# EAGLE board speedy barebone (EAGLE 9.5.2)
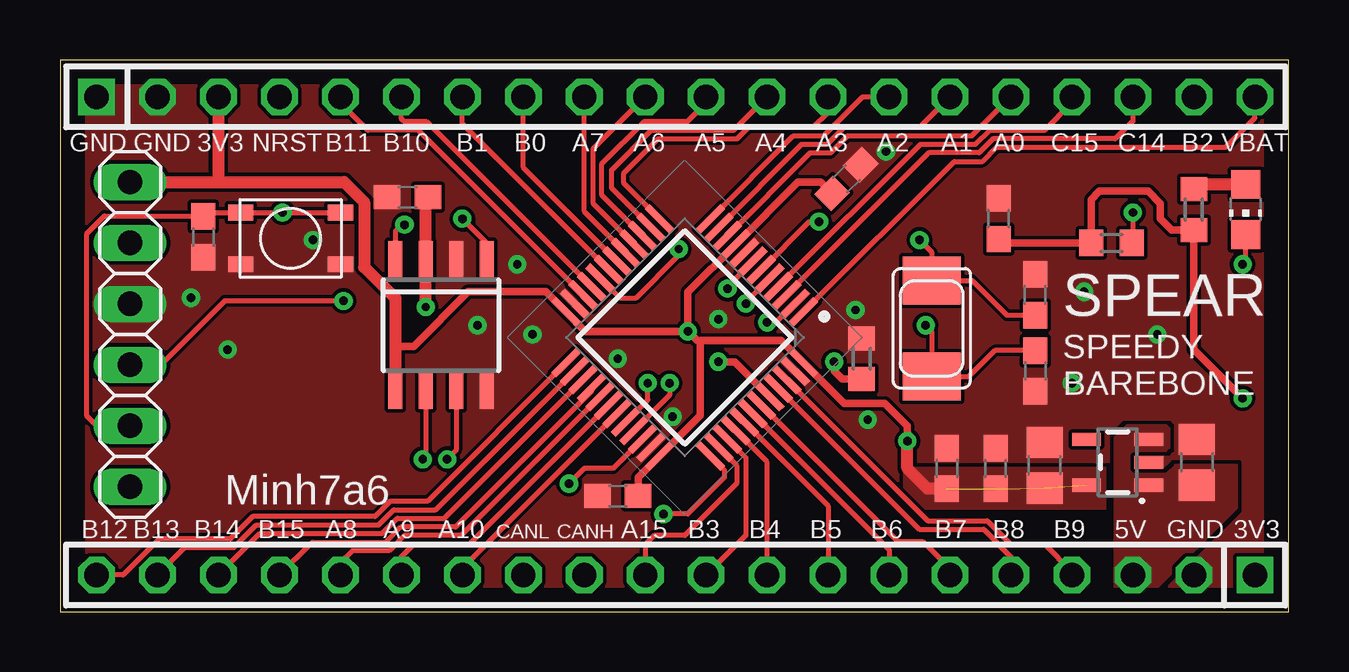
[diagram p0: board, top side]
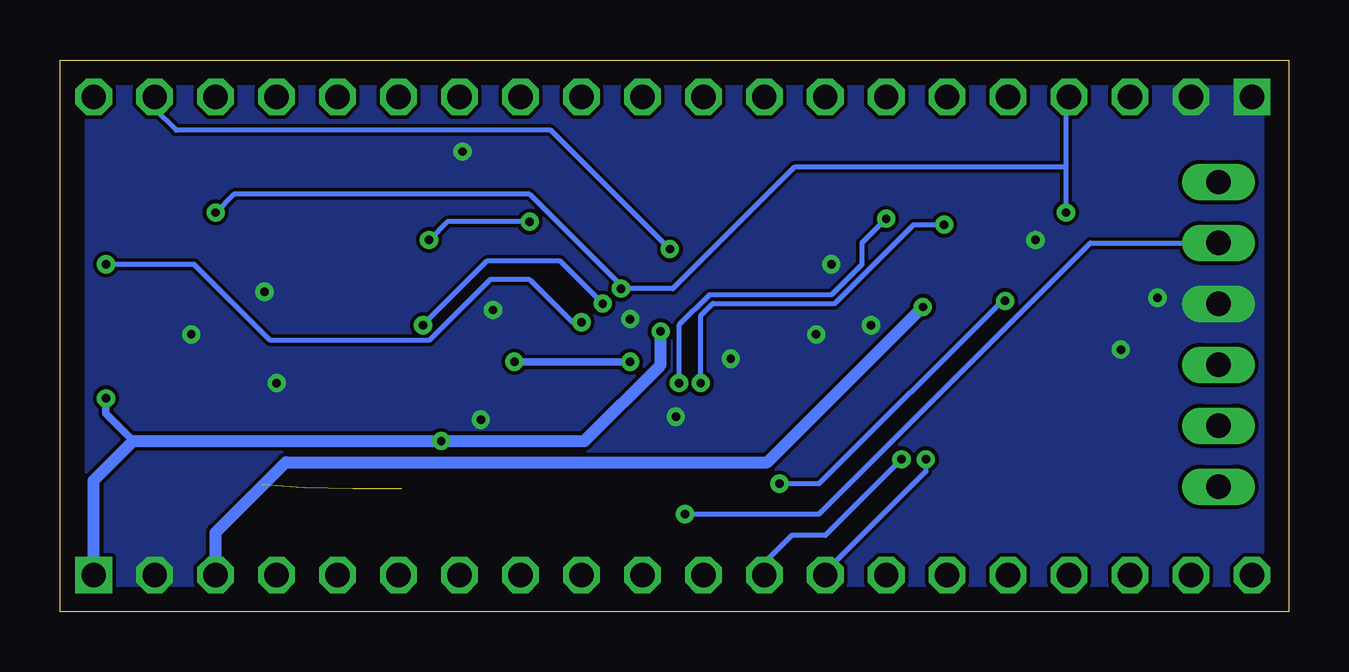
[diagram p1: board, bottom side, seen from below]

Size 51.19 x 23 mm. Coordinates in mm from the lower left corner, seen from the top.
Outline: 51.19,0 51.19,23 0,23 0,0 51.19,0
Copper layers (1*16): Top 0.035mm / dielectric 1.5mm / Bottom 0.035mm
Design rules "default *": minimum track width 6mil, minimum drill 0.35mm, track to track 6mil, track to pad 6mil, pad to pad 6mil, via to via 6mil, smd to smd 6mil, copper to edge 40mil, drill to drill 6mil, minimum pad ring 10mil, minimum via ring 8mil, stop-mask expansion 4mil, vias tented up to drill 30mil, thermal gap 10mil

## Footprints (pad centres in the part's own frame; a part is rotated, then mirrored left to right if it is on the bottom)
C0805 = smd 1.3 x 1.5: 1 -0.95,0; 2 0.95,0
C0603 = smd 1.1 x 1: 1 -0.85,0; 2 0.85,0
QFP50P900X900X160-48N = smd 1.475 x 0.3: 1 -4.238,2.75; 2 -4.238,2.25; 3 -4.238,1.75; 4 -4.238,1.25; 5 -4.238,0.75; 6 -4.238,0.25; 7 -4.238,-0.25; 8 -4.238,-0.75; 9 -4.238,-1.25; 10 -4.238,-1.75; 11 -4.238,-2.25; 12 -4.238,-2.75; 25 4.238,-2.75; 26 4.238,-2.25; 27 4.238,-1.75; 28 4.238,-1.25; 29 4.238,-0.75; 30 4.238,-0.25; 31 4.238,0.25; 32 4.238,0.75; 33 4.238,1.25; 34 4.238,1.75; 35 4.238,2.25; 36 4.238,2.75 | smd 0.3 x 1.475: 13 -2.75,-4.238; 14 -2.25,-4.238; 15 -1.75,-4.238; 16 -1.25,-4.238; 17 -0.75,-4.238; 18 -0.25,-4.238; 19 0.25,-4.238; 20 0.75,-4.238; 21 1.25,-4.238; 22 1.75,-4.238; 23 2.25,-4.238; 24 2.75,-4.238; 37 2.75,4.238; 38 2.25,4.238; 39 1.75,4.238; 40 1.25,4.238; 41 0.75,4.238; 42 0.25,4.238; 43 -0.25,4.238; 44 -0.75,4.238; 45 -1.25,4.238; 46 -1.75,4.238; 47 -2.25,4.238; 48 -2.75,4.238
1X20 = drill 1.016 square: 1 -24.13,0 | drill 1.016 octagon: 2 -21.59,0; 3 -19.05,0; 4 -16.51,0; 5 -13.97,0; 6 -11.43,0; 7 -8.89,0; 8 -6.35,0; 9 -3.81,0; 10 -1.27,0; 11 1.27,0; 12 3.81,0; 13 6.35,0; 14 8.89,0; 15 11.43,0; 16 13.97,0; 17 16.51,0; 18 19.05,0; 19 21.59,0; 20 24.13,0
1X06 = drill 1.016 long: 1 -6.35,0; 2 -3.81,0; 3 -1.27,0; 4 1.27,0; 5 3.81,0; 6 6.35,0
CHIP-LED0805 = smd 1.2 x 1.2: A 0,-1.05; C 0,1.05
R0603 = smd 1 x 1.1: 1 -0.85,0; 2 0.85,0
SOT23-5 = smd 0.55 x 1.2: 1 -0.95,-1.3; 2 0,-1.3; 3 0.95,-1.3; 4 0.95,1.3; 5 -0.95,1.3
SOIC8 = smd 0.6 x 1.5: 1 -1.905,-2.75; 2 -0.635,-2.75; 3 0.635,-2.75; 4 1.905,-2.75; 5 1.905,2.75; 6 0.635,2.75; 7 -0.635,2.75; 8 -1.905,2.75
4.2X3.25 = smd 1.05 x 0.65: P$1 0,0; P$2 4.15,0; P$3 4.15,2.15; P$4 0,2.15
NX5032 = smd 2 x 2.4: P$1 2,0; P$2 -2,0

## Placement (x,y rotation side)
C1  10uF  [C0805]  47.37,6.22 90 top
C2  10uF  [C0805]  41.02,6.1 90 top
C3  100nF  [C0603]  23.24,4.83 180 top
C4  22pF  [C0603]  40.64,10.03 270 top
C5  22pF  [C0603]  40.64,13.21 90 top
C7  100nF  [C0603]  14.48,17.27 180 top
C10  100nF  [C0603]  5.97,15.62 270 top
C14  100nF  [C0603]  32.77,18.03 45 top
C15  100nF  [C0603]  36.96,5.97 90 top
C16  100nF  [C0603]  39.12,16.38 90 top
C17  100nF  [C0603]  38.99,5.97 90 top
IC2  STM32F103C8T6  [QFP50P900X900X160-48N]  26.04,11.43 225 top
JP1  [1X20]  25.65,1.52 180 top
JP2  [1X20]  25.65,21.46 0 top
JP3  [1X06]  2.92,11.56 90 top
LED2  [CHIP-LED0805]  49.4,16.76 180 top
R1  100k  [R0603]  33.4,10.54 90 top
R8  10k  [R0603]  43.81,15.37 180 top
R10  1k  [R0603]  47.24,16.76 90 top
U1  3.3V  [SOT23-5]  44.07,6.22 90 top
U$1  MCP2562-E/SN  [SOIC8]  15.88,11.94 180 top
U$2  4.2X3.25-TACTILE-SWITCH  [4.2X3.25]  11.68,16.64 180 top
X1  8MHz  [NX5032]  36.32,11.81 270 top

## Library data of the parts
C1-C3 C7 C10 C14-C17 = rcl; SPICEPREFIX: C
C4 C5 = resistor
IC2 = LCSC; DESCRIPTION: STM32F103C8T6, 32 bit ARM Cortex M3 Microcontroller 72MHz 64kb Flash, 20kb RAM, USB I2C SPI 48-Pin LQFP; HEIGHT: 1.6mm; MANUFACTURER_NAME: STMicroelectronics; MANUFACTURER_PART_NUMBER: STM32F103C8T6; MOUSER_PART_NUMBER: 511-STM32F103C8T6
JP1-JP3 = pinhead
LED2 = led
R1 R8 R10 = rcl; SPICEPREFIX: R
U1 = SparkFun-IC-Power; PROD_ID: VREG-12457
U$1 = SPEAR
U$2 = LCSC
X1 = adafruit

## Nets
3.3V: C2.1 C3.1 C14.1 C15.1 C16.1 C17.1 IC2.9 IC2.24 IC2.36 IC2.48 JP1.1 JP2.3 JP3.6 R8.2 R10.1 U1.5 U$1.5
5V: C1.1 C7.1 JP1.3 U1.1 U1.3 U$1.3
BOOT0: IC2.44 R1.1
CANH: JP1.12 U$1.7
CANL: JP1.13 U$1.6
GND: C1.2 C2.2 C3.2 C4.2 C5.2 C7.2 C10.2 C14.2 C15.2 C16.2 C17.2 IC2.8 IC2.23 IC2.35 IC2.47 JP1.2 JP2.1 JP2.2 JP3.4 R1.2 U1.2 U$1.2 U$1.8 U$2.P$3 U$2.P$4
N$9: LED2.A R10.2
NRST: C10.1 IC2.7 JP2.4 JP3.2 R8.1 U$2.P$1 U$2.P$2
OSC32_IN: IC2.3 JP2.18
OSC32_OUT: IC2.4 JP2.17
OSC_IN: C4.1 IC2.5 X1.P$1
OSC_OUT: C5.1 IC2.6 X1.P$2
PA0-WKUP: IC2.10 JP2.16
PA1: IC2.11 JP2.15
PA2: IC2.12 JP2.14
PA3: IC2.13 JP2.13
PA4: IC2.14 JP2.12
PA5: IC2.15 JP2.11
PA6: IC2.16 JP2.10
PA7: IC2.17 JP2.9
PA8: IC2.29 JP1.16
PA9: IC2.30 JP1.15
PA10: IC2.31 JP1.14
PA11: IC2.32 U$1.4
PA12: IC2.33 U$1.1
PA15: IC2.38 JP1.11
PB0: IC2.18 JP2.8
PB1: IC2.19 JP2.7
PB2: IC2.20 JP2.19
PB3_SWO: IC2.39 JP1.10
PB4: IC2.40 JP1.9
PB5: IC2.41 JP1.8
PB6: IC2.42 JP1.7
PB7: IC2.43 JP1.6
PB8: IC2.45 JP1.5
PB9: IC2.46 JP1.4
PB10: IC2.21 JP2.6
PB11: IC2.22 JP2.5
PB12: IC2.25 JP1.20
PB13: IC2.26 JP1.19
PB14: IC2.27 JP1.18
PB15: IC2.28 JP1.17
PC13: IC2.2 LED2.C
SWCLK: IC2.37 JP3.5
SWDIO: IC2.34 JP3.3
VBAT: IC2.1 JP2.20

## Tracks (layer width: path | path; a pad name or v marks a point on that pad's centre or on a via)
3.3V  (via drill 0.35)  (3 unrouted)
  Top 0.305: C14.1 31.69,17.91 30.74,17.91 IC2.9 26.16,13.32 v26.16,11.68 | C3.1 24.09,5.6 IC2.36 26.67,8.18 26.67,11.3 | v26.16,11.68 26.54,11.3 26.67,11.3 | 26.67,11.3 30.05,11.3 IC2.48 32.67,8.68 34.37,8.68 35.31,7.75 v35.31,7.11 | v26.16,11.68 21.89,11.68 IC2.24 20.24,13.34 17.02,13.34 14.73,11.05 13.97,11.05 | C16.1 39.28,15.37 R8.2 42.97,17.18 43.31,17.53 45.34,17.53 45.85,17.02 45.85,16.38 46.32,15.91 R10.1 47.24,10.92 v49.28,8.89 | U$1.5 13.97,9.4
  Top 0.508: C15.1 36.16,5.12 35.31,5.97 v35.31,7.11 | 13.97,9.4 13.97,11.05 13.97,13.06 12.67,14.36 12.67,17.07 11.84,17.91 6.6,17.91 | JP3.6 6.6,17.91 | JP2.3 6.6,17.91
  Bottom 0.305: v49.28,8.89 49.28,8.26 48.13,7.11
  Bottom 0.508: v26.16,11.68 26.16,10.29 29.34,7.11 v35.31,7.11 48.13,7.11 49.78,5.46 JP1.1
  pour Top (no thermals): 43.56,5.97 35.18,5.97 35.18,4.32 43.56,4.32
5V  (via drill 0.35)
  Top 0.508: v15.24,12.7 U$1.3 15.24,17.18 C7.1
  Bottom 0.508: JP1.3 44.7,3.3 41.78,6.22 21.72,6.22 v15.24,12.7
  pour Top (no thermals): 43.94,0.64 45.34,0.64 49.02,4.32 49.02,6.1 46.48,6.1 46.1,5.71 44.83,5.71 44.58,5.97 44.58,6.48 44.7,6.6 45.97,6.6 46.23,6.86 46.23,7.62 46.1,7.75 44.45,7.75 43.94,7.24
BOOT0  (via drill 0.35)
  Top 0.203: IC2.44 29.03,9.49
  Top 0.305: 29.03,9.49 28.11,10.41 v27.43,10.41 | v32.26,10.41 32.26,10.03 32.6,9.69 R1.1
  Bottom 0.305: v32.26,10.41 v27.43,10.41
CANH  (via drill 0.35)
  Top 0.203: U$1.7 16.51,6.73 v16.13,6.35
  Bottom 0.203: v16.13,6.35 19.3,3.17 20.7,3.17 21.84,2.03 JP1.12
CANL  (via drill 0.35)
  Top 0.203: U$1.6 15.24,6.48 v15.11,6.35
  Bottom 0.203: v15.11,6.35 15.11,5.84 19.3,1.65 JP1.13
GND  (via drill 0.35)
  other vias: 27.43,12.19 33.66,8 33.15,12.57 42.67,13.34 45.72,11.56 42.16,9.53 6.99,10.92 5.46,13.08 10.54,15.49 19.68,11.56 19.05,14.48 17.4,11.94 23.24,10.54 34.42,19.18 25.53,8.13
  pour Bottom (no thermals): -0.13,22.99 -0.13,0 51.18,0 51.18,22.99
  pour Top (rank 6, no thermals): -0.13,22.99 -0.13,0 51.18,0 51.18,22.99
N$9
  Top 0.508: R10.2 47.44,17.81 LED2.A
NRST  (via drill 0.35)
  Top 0.203: IC2.7 27.81,13.56 v27.81,13.46 | v44.7,16.64 44.7,15.41 R8.1 | C10.1 5.99,16.49 | 5.99,16.49 6.13,16.64 U$2.P$2 v9.27,16.64 U$2.P$1 | JP3.2 1.52,7.75 1.12,8.15 1.12,15.76 1.85,16.49 5.99,16.49
  Bottom 0.203: v44.7,16.64 43.94,17.4 31.62,17.4 27.81,13.59 v27.81,13.46 25.65,13.46 20.57,18.54 9.27,18.54 | JP2.4 9.27,21.34 9.27,18.54 | v9.27,16.64 9.27,18.54
OSC32_IN
  Top 0.203: JP2.18 44.7,20.45 43.97,19.71 38.88,19.71 38.29,19.13 36.21,19.13 IC2.3
OSC32_OUT
  Top 0.203: IC2.4 35.85,19.48 38.15,19.48 38.73,20.07 41.02,20.07 42.16,21.21 JP2.17
OSC_IN  (via drill 0.35)
  Top 0.203: IC2.5 28.57,12.91 v28.57,12.84 | v36.07,11.94 36.32,11.68 36.32,9.91 | 36.32,9.91 X1.P$1 | C4.1 38.95,10.88 37.85,9.78 36.45,9.78 36.32,9.91
  Bottom 0.203: v28.57,12.84 30.34,14.61 33.4,14.61 v36.07,11.94
OSC_OUT  (via drill 0.35)
  Top 0.203: IC2.6 31.21,16.26 v31.62,16.26 | v35.81,15.49 36.32,14.99 X1.P$2 38.01,13.81 39.46,12.36 C5.1
  Bottom 0.203: v31.62,16.26 35.05,16.26 v35.81,15.49
PA0-WKUP
  Top 0.203: IC2.10 31.26,19.13 32.11,19.13 32.82,19.84 38,19.84 JP2.16
PA1
  Top 0.203: IC2.11 30.91,19.48 31.96,19.48 32.67,20.19 35.81,20.19 JP2.15
PA2
  Top 0.203: IC2.12 30.55,19.84 31.82,19.84 33.44,21.46 JP2.14
PA3
  Top 0.203: IC2.13 23.5,17.86 23.5,18.29 24.92,19.71 28.21,19.71 28.7,20.19 31.37,20.19 32,20.83 JP2.13
PA4
  Top 0.203: IC2.14 22.99,17.66 22.99,18.41 24.64,20.07 28.07,20.07 JP2.12
PA5
  Top 0.203: IC2.15 22.58,17.36 22.58,18.67 24.36,20.45 26.16,20.45 26.92,21.21 JP2.11
PA6
  Top 0.203: IC2.16 22.23,17.01 22.23,19.3 JP2.10
PA7
  Top 0.203: IC2.17 21.84,16.68 JP2.9
PA8
  Top 0.203: IC2.29 16.72,3.17 14.35,3.17 13.72,2.54 12.19,2.54 11.68,2.03 JP1.16
PA9
  Top 0.203: JP1.15 14.22,2.29 14.73,2.79 17.05,2.79 IC2.30
PA10
  Top 0.203: IC2.31 16.76,1.8 JP1.14
PA11  (via drill 0.35)
  Top 0.203: IC2.32 24.49,8.83 v24.49,9.53 | v14.35,16.13 14.22,16.13 13.97,15.88 U$1.4
  Bottom 0.203: v24.49,9.53 24.49,12.34 23.98,12.85 18.9,12.85 15.63,16.13 v14.35,16.13
PA12  (via drill 0.35)
  Top 0.203: U$1.1 17.78,15.37 v16.76,16.38 | v25.4,9.53 25.4,9.03 IC2.33
  Bottom 0.203: v16.76,16.38 17.78,15.37 17.78,14.48 19.05,13.21 24.13,13.21 25.4,11.94 v25.4,9.53
PA15
  Top 0.203: IC2.38 28.19,6.09 28.19,5.33 26.04,3.17 24.77,3.17 24.38,2.79 JP1.11
PB0
  Top 0.203: IC2.18 19.3,18.52 JP2.8
PB1
  Top 0.203: IC2.19 16.76,20.35 JP2.7
PB2  (via drill 0.35)
  Top 0.203: IC2.20 23.32,13.08 24,13.08 25.78,14.86 v25.78,15.11
  Bottom 0.203: v25.78,15.11 30.73,20.07 46.35,20.07 47.24,20.95 JP2.19
PB3_SWO
  Top 0.203: IC2.39 28.57,6.42 28.57,3.17 JP1.10
PB4
  Top 0.203: JP1.9 29.46,6.23 IC2.40
PB5
  Top 0.203: IC2.41 32,4.4 JP1.8
PB6
  Top 0.203: IC2.42 34.54,2.57 JP1.7
PB7
  Top 0.203: IC2.43 34.9,2.92 35.94,2.92 37.08,1.78 JP1.6
PB8
  Top 0.203: IC2.45 35.8,3.43 38.48,3.43 39.62,2.29 JP1.5
PB9
  Top 0.203: IC2.46 36.16,3.79 38.63,3.79 39.62,2.79 41.02,2.79 42.16,1.65 JP1.4
PB10
  Top 0.203: IC2.21 15.28,20.42 14.35,20.42 14.22,20.55 JP2.6
PB11
  Top 0.203: IC2.22 14.92,20.07 12.83,20.07 11.68,21.21 JP2.5
PB12
  Top 0.203: IC2.25 15.31,4.6 13.76,4.6 13.13,3.96 8.04,3.96 7.1,3.02 4.13,3.02 2.63,1.52 JP1.20
PB13
  Top 0.203: JP1.19 5.21,2.67 7.24,2.67 8.18,3.61 13.27,3.61 13.91,4.24 15.66,4.24 IC2.26
PB14
  Top 0.203: JP1.18 8.33,3.25 13.42,3.25 14.06,3.89 16.02,3.89 IC2.27
PB15
  Top 0.203: JP1.17 10.52,2.9 13.57,2.9 14.2,3.53 16.48,3.53 22.15,9.2 IC2.28
PC13  (via drill 0.35)
  Top 0.203: IC2.2 29.85,12.06 v29.46,12.06 | v49.28,14.48 49.4,14.61 LED2.C
  Bottom 0.203: v29.46,12.06 29.84,12.06 31.62,13.84 33.27,13.84 35.81,11.31 42.42,11.31 45.59,14.48 v49.28,14.48
SWCLK  (via drill 0.35)
  Top 0.203: IC2.37 27.69,5.89 27.69,5.59 26.16,4.06 v25.15,4.06
  Bottom 0.203: v25.15,4.06 19.56,4.06 8.26,15.37 JP3.5
SWDIO  (via drill 0.35)
  Top 0.203: v21.21,5.33 21.84,5.97 23.05,5.97 IC2.34 | v11.81,12.95 6.86,12.95 4.19,10.29 JP3.3
  Bottom 0.203: v21.21,5.33 19.56,5.33 11.94,12.95 v11.81,12.95
VBAT
  Top 0.203: IC2.1 37.27,18.77 38.44,18.77 39.02,19.36 48.56,19.36 49.78,20.57 JP2.20

## Text on the board
tPlace: GND | GND | 3V3 | NRST | B11 | B10 | A2 | A1 | A0 | C15 | C14 | B2 | VBAT | SPEAR | SPEEDY / BAREBONE | Minh7a6 | B12 | B13 | B14 | B15 | A8 | A9 | A10 | CANL | CANH | A15 | B3 | B4 | B5 | B6 | B7 | B8 | B9 | 5V | 3V3
tNames: B1 | B0 | A7 | A6 | A5 | A4 | A3 | GND